# Altium PCB BLE_Motion_Tracker_PCB.PcbDoc
Units mil, origin at the board's own origin, x right, y up, seen from the top; angles counter-clockwise.
Board outline 2100 x 2000 mil, 4 copper layers (Top Layer, Ground Layer, Power Layer, Bottom Layer), stack 23.756 mil thick; 15 components, 15 nets, 79 pads, 15 vias.
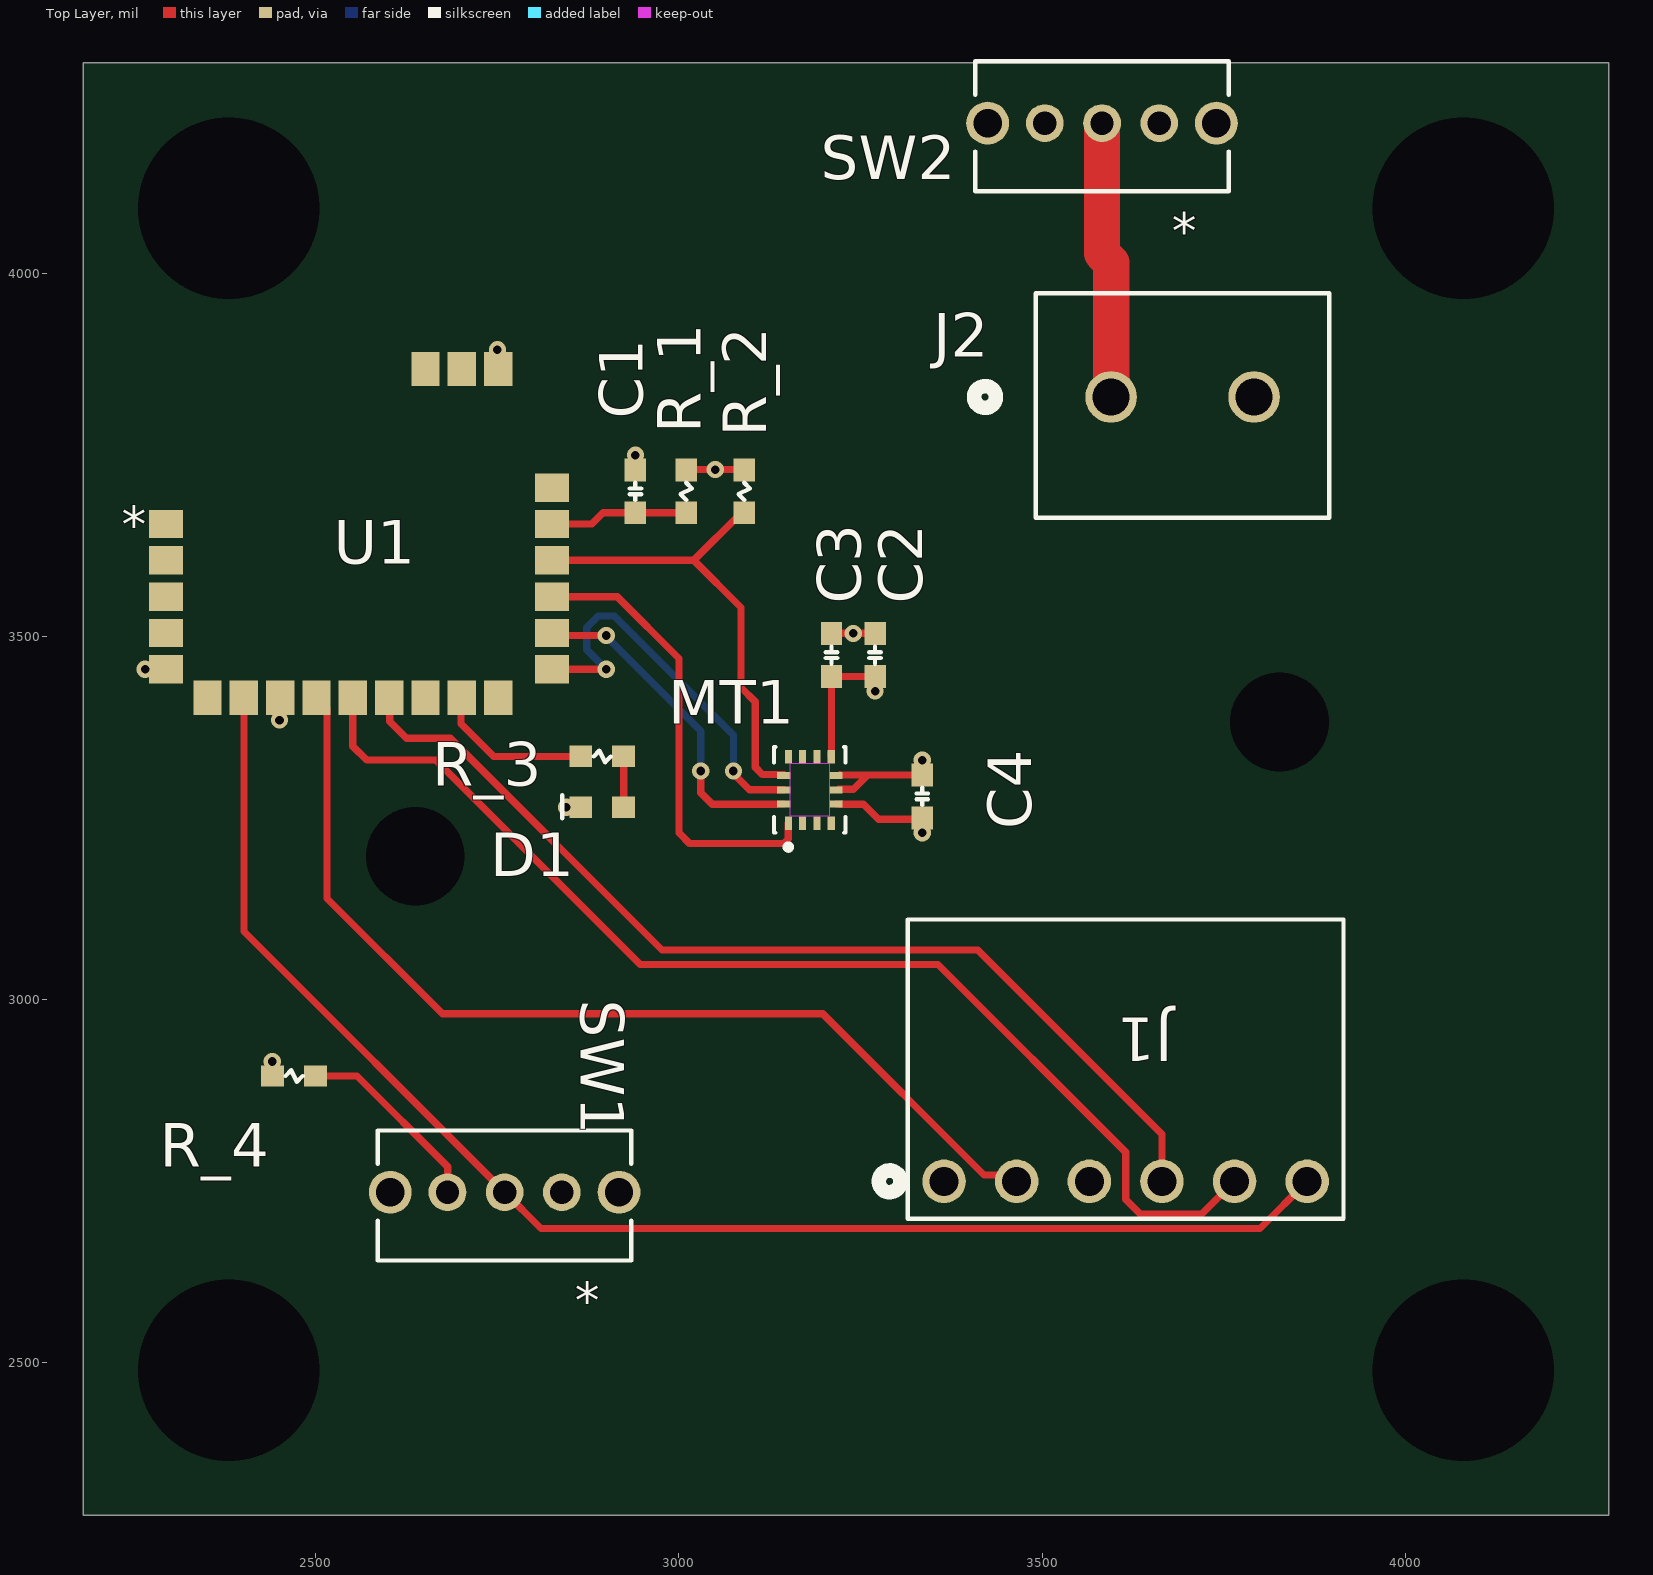
[diagram p0: Top Layer view]
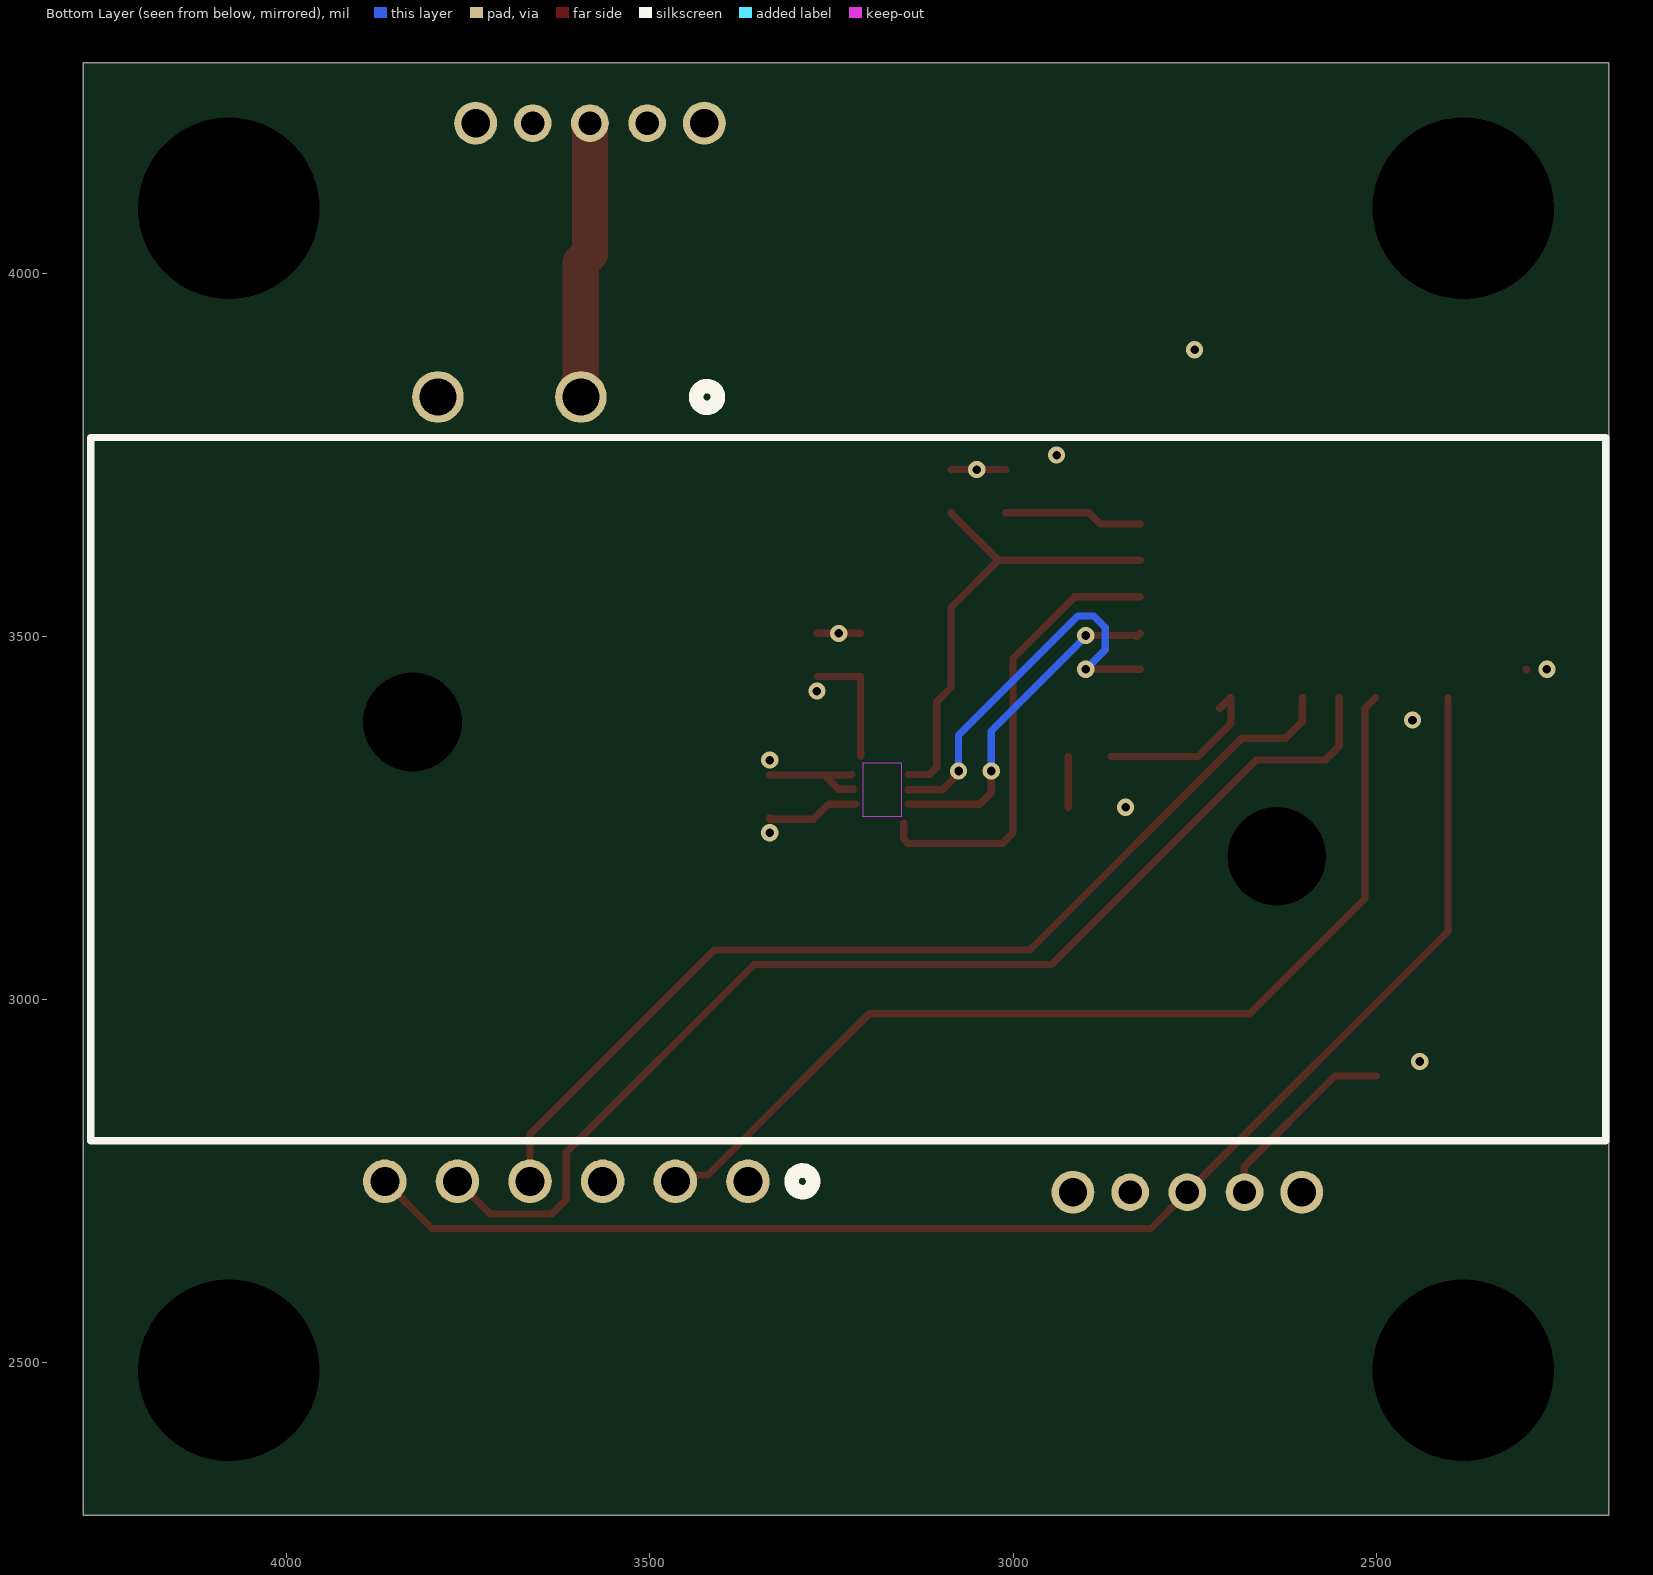
[diagram p1: Bottom Layer view, seen from below]
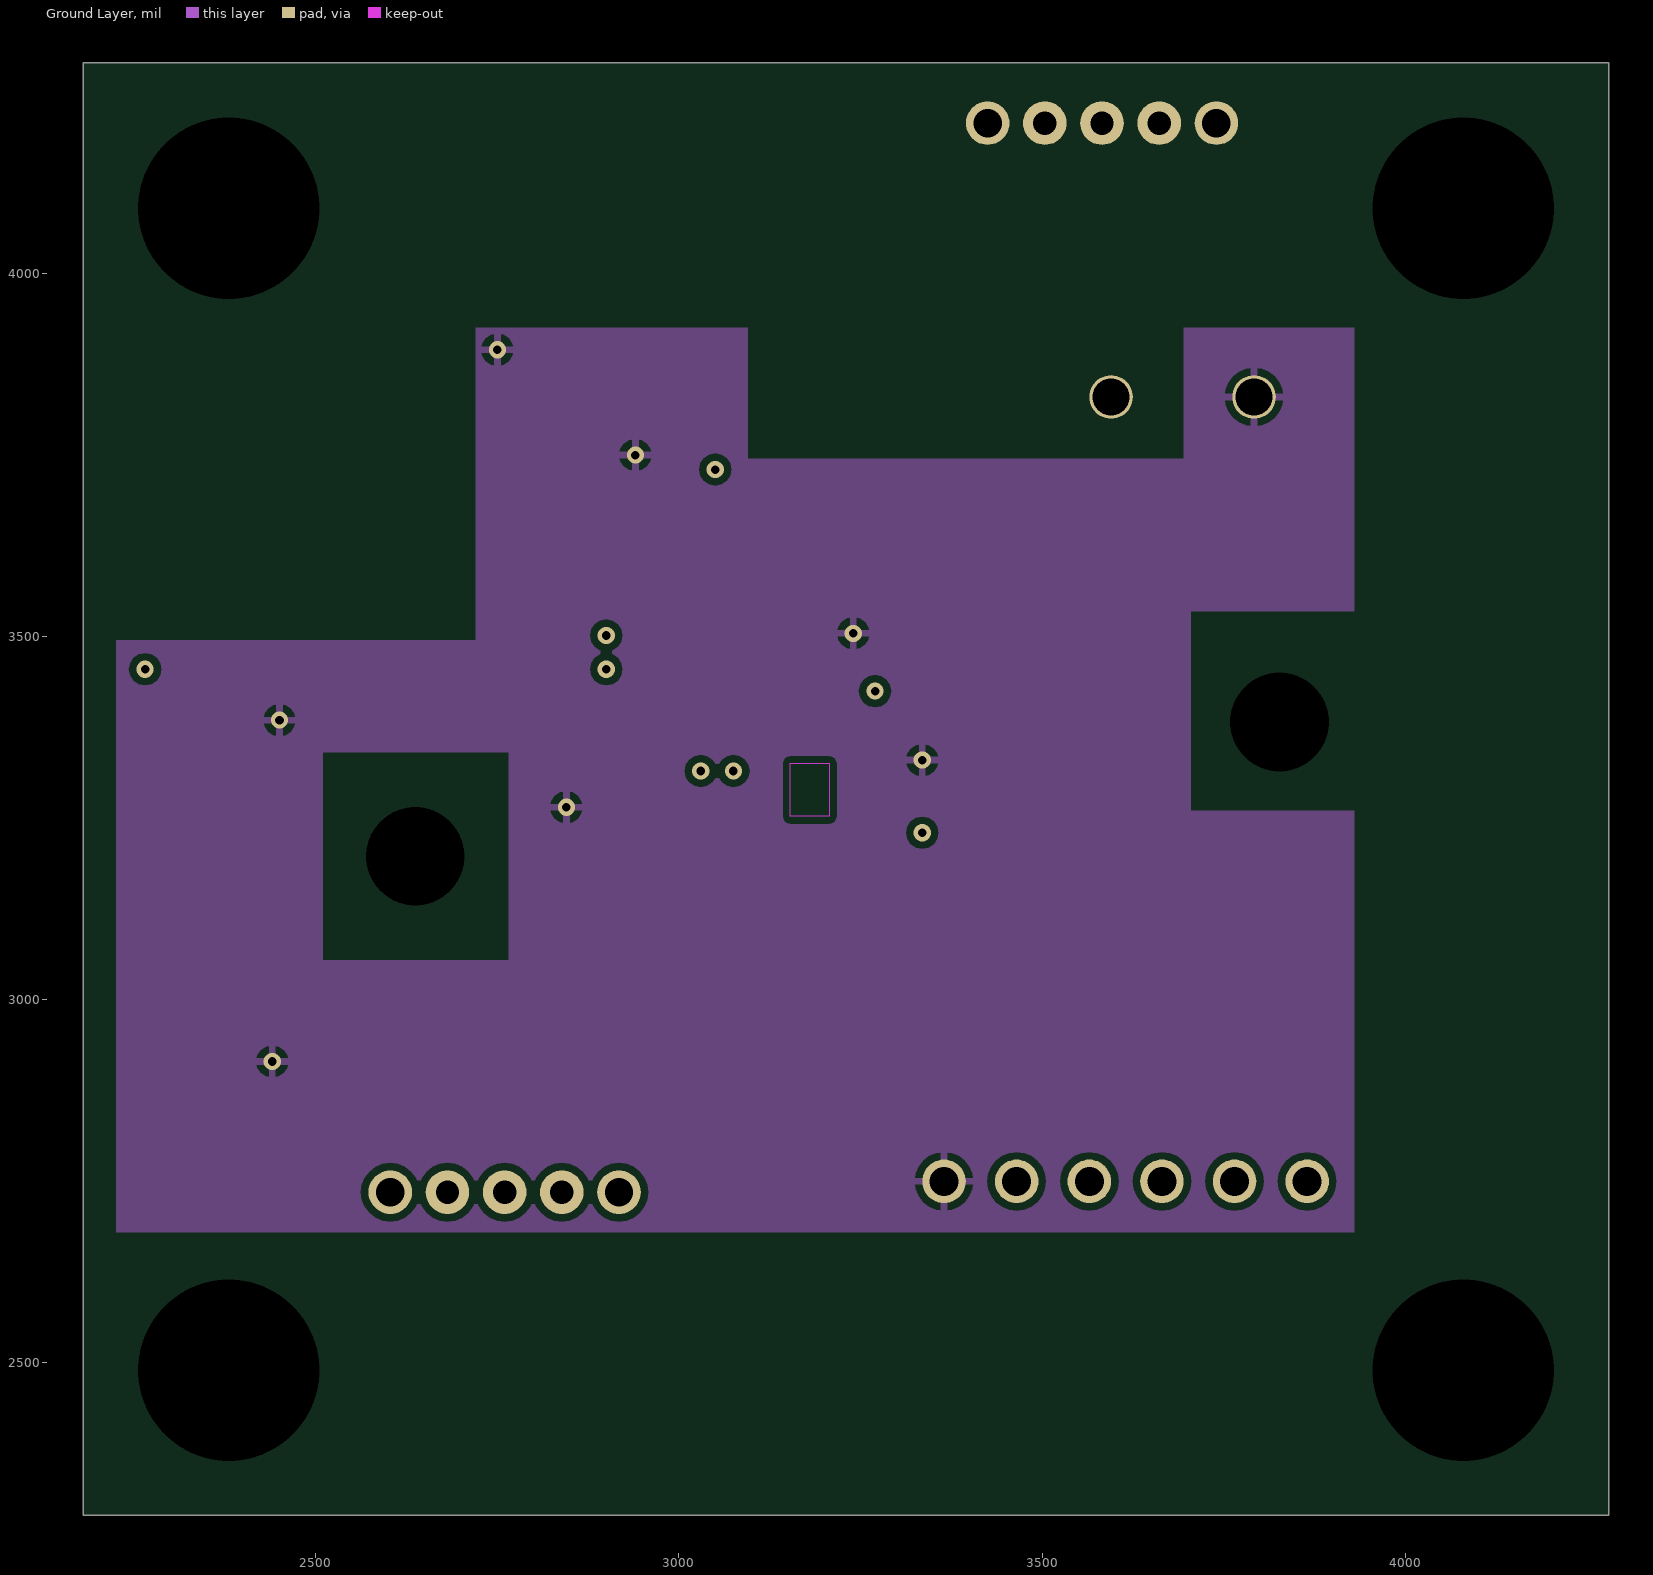
[diagram p2: Ground Layer]
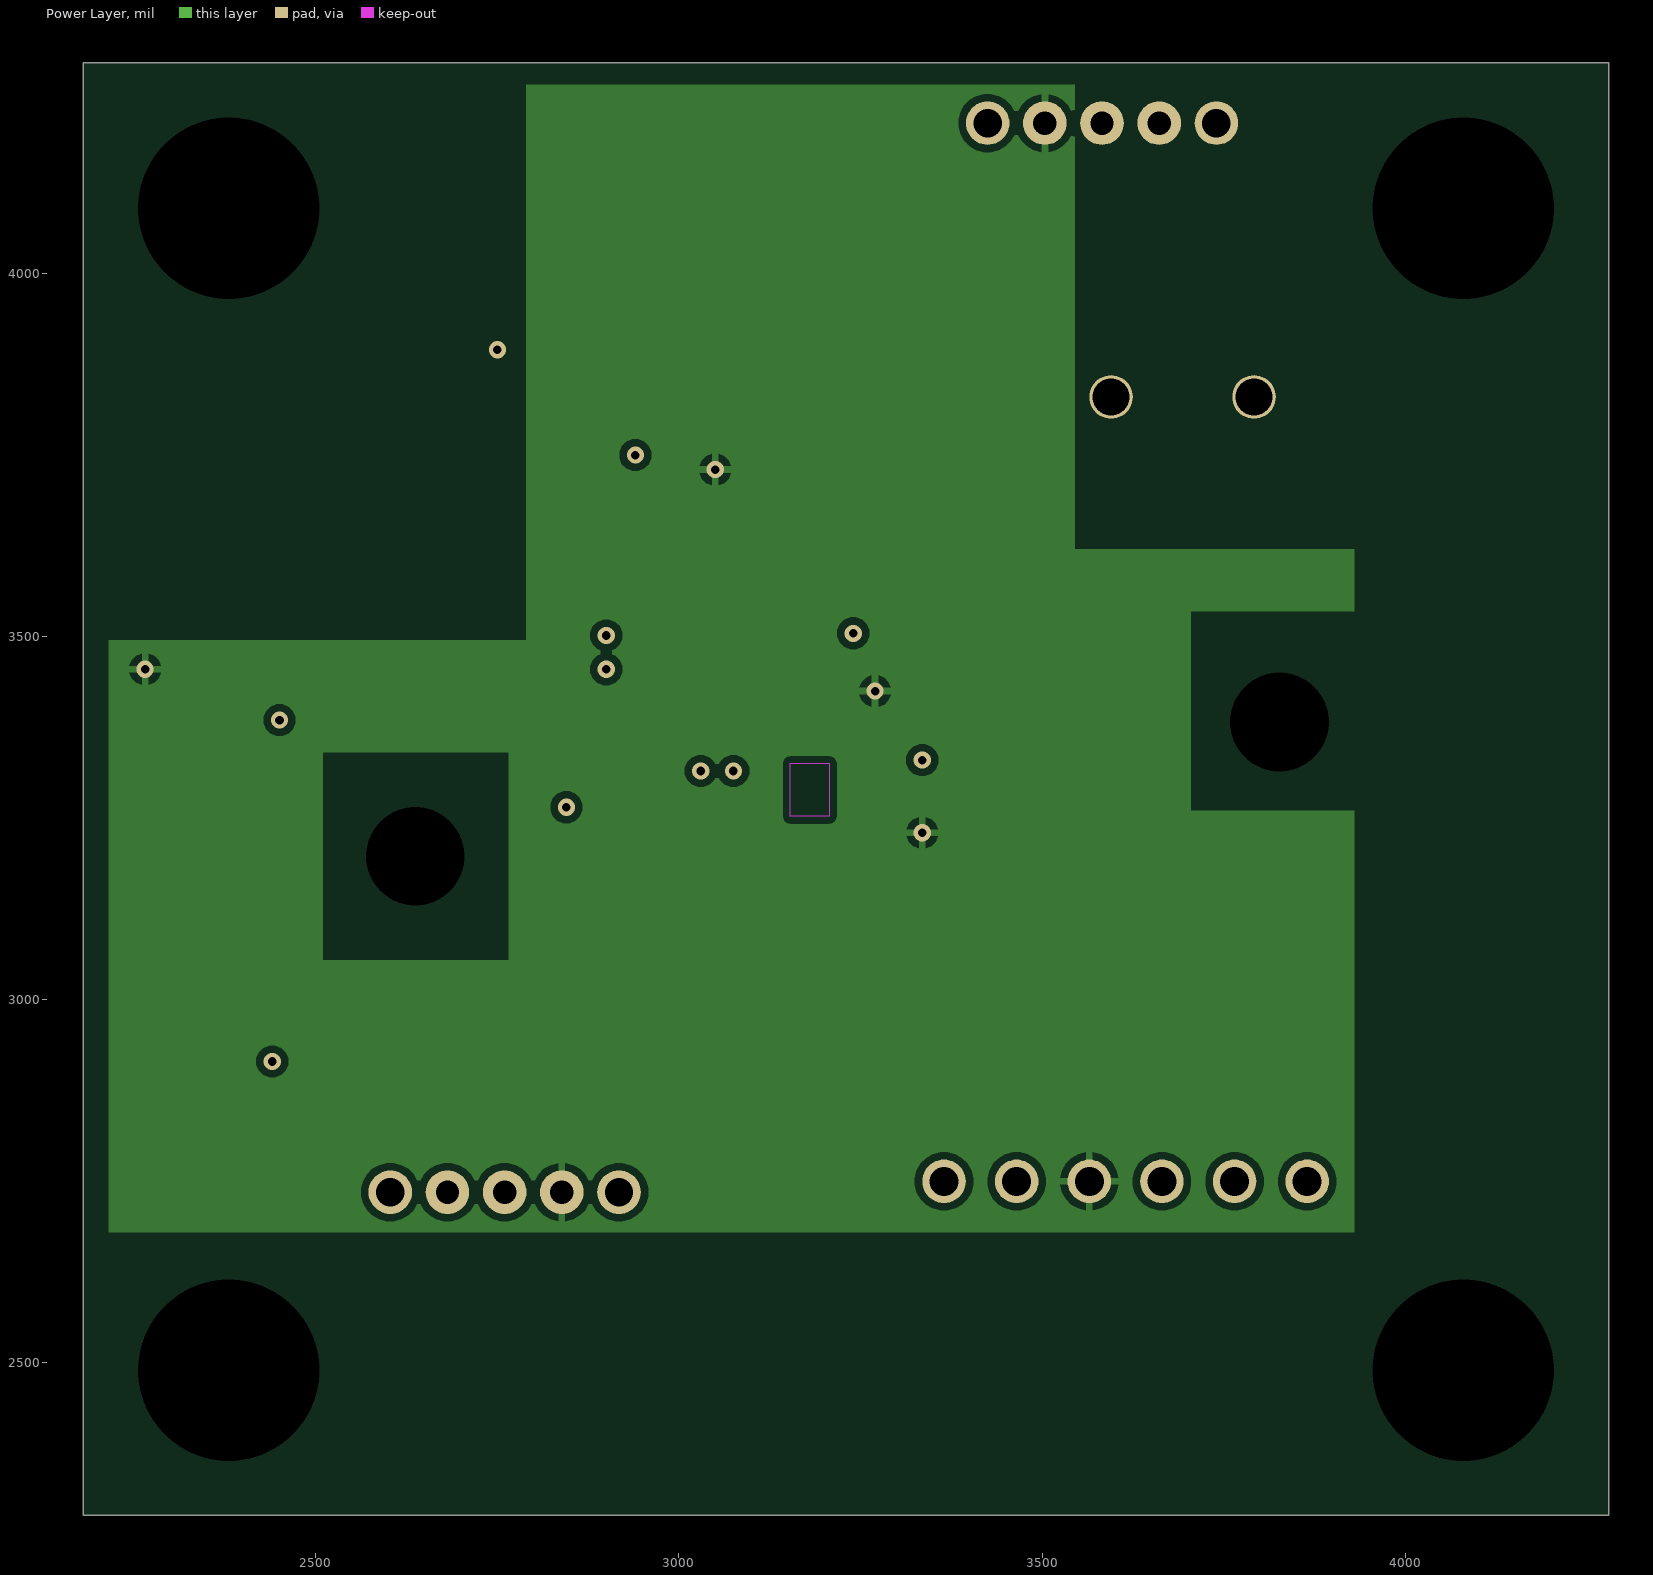
[diagram p3: Power Layer]
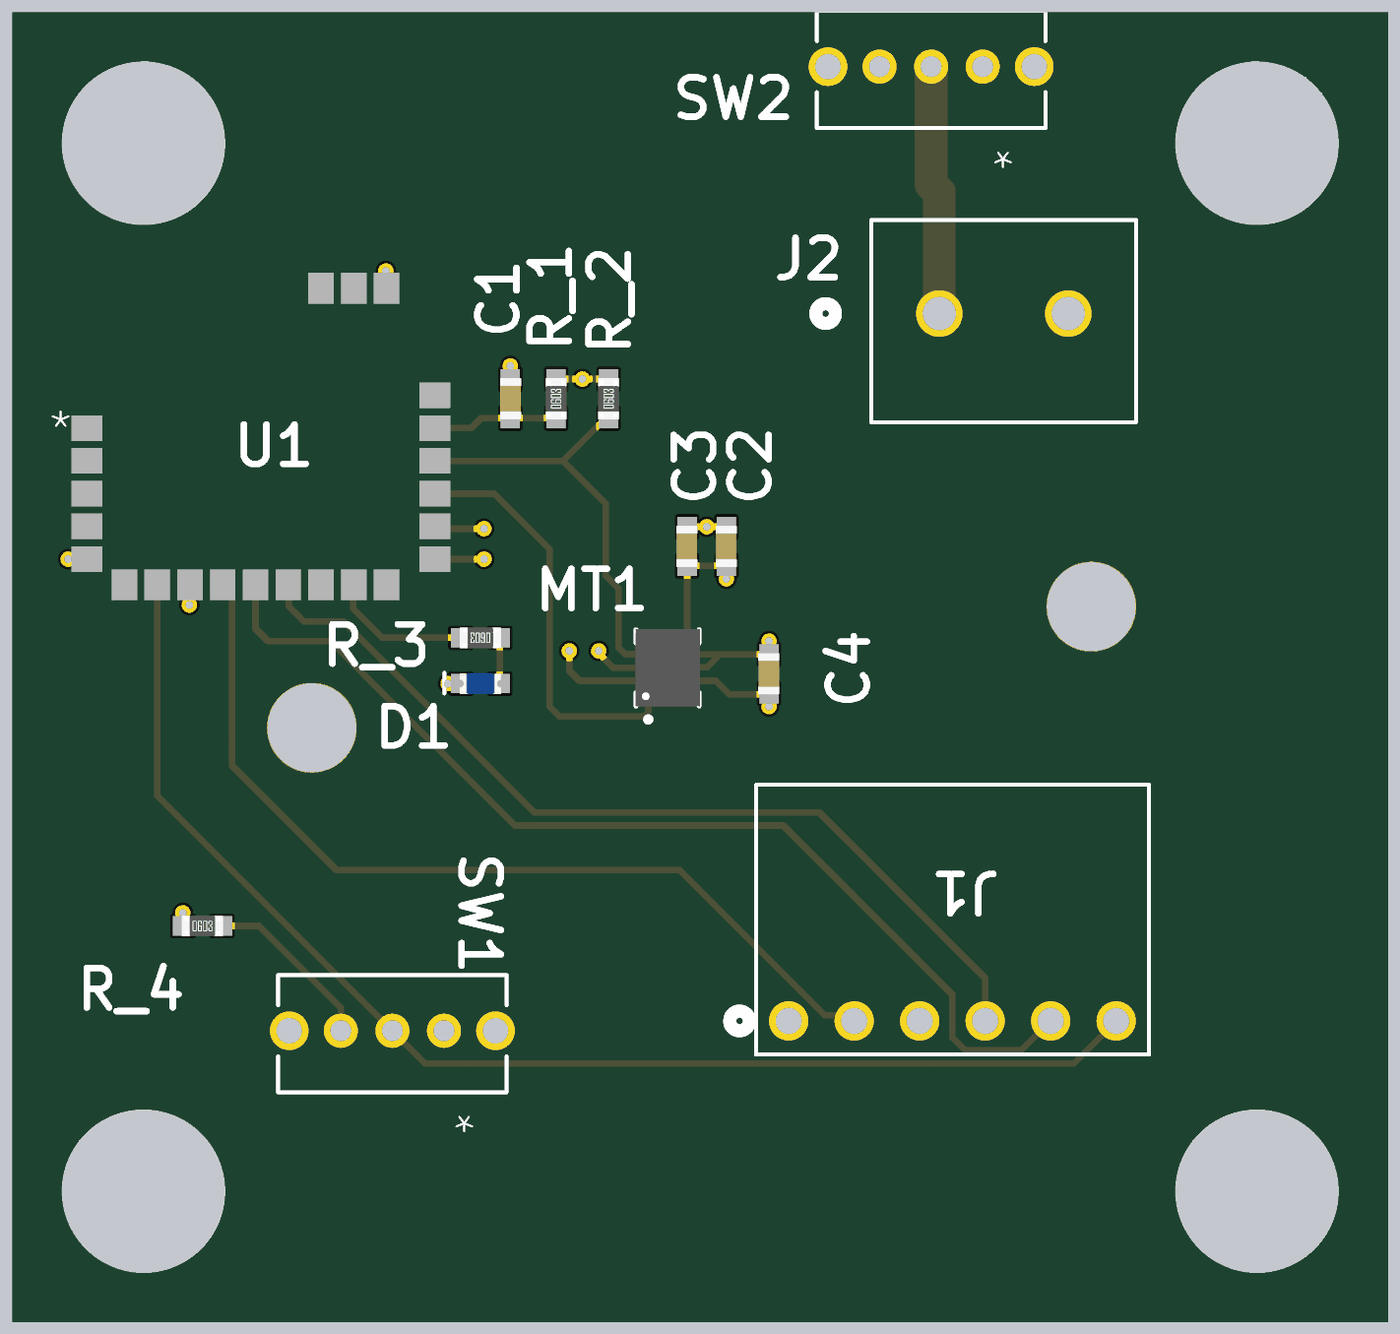
[diagram p4: 3D render of the assembled board from above, using the file's embedded part models]

## Layer stack, top to bottom
Top Solder: solder mask 0.4, Solder Resist, Dk 3.5
Top Layer: signal copper 1.4
Dielectric 2: prepreg 2.8, PP-006, Dk 4.1
Ground Layer: signal copper 1.378
Dielectric 1: dielectric 12.6, FR-4, Dk 4.8
Power Layer: signal copper 1.378
Dielectric 3: prepreg 2.8, PP-006, Dk 4.1
Bottom Layer: signal copper 1.4
Bottom Solder: solder mask 0.4, Solder Resist, Dk 3.5

## Board outline
2180,2290 4280,2290 4280,4290 2180,4290

## Design rules (kind name [scope] priority, off if disabled: settings)
Clearance [All] p1: gap=10 ignorepadtopadclearanceinfootprint=FALSE
PolygonConnect [All] p1: connectstyle=Relief reliefconductorwidth=10 reliefentries=4 polygonreliefangle="90 Angle" airgapwidth=10
RoutingVias [All] p1: holewidth=28 width=50 viastyle="Through Hole" minholewidth=28 minwidth=50 maxholewidth=28 maxwidth=50
SolderMaskExpansion [All] p1: expansion=4 istentingtop=FALSE
SupplyNets "Schematic Supply Nets_1" [InNet('GND')] p1: voltage=0.000
SupplyNets "Schematic Supply Nets" [InNet('3V')] p2: voltage=0.000
Width [All] p1: maxlimit=50 minlimit=10 preferedwidth=10 minimp=50.000000 maximp=50.000000 favimp=50.000000
30 further rules are at their usual default settings.

## Classes and differential pairs
component class Connectors: J1 J2 SW2
component class BLUENRG-M2SA: C1 D1 R_1 R_2 R_3 R_4 SW1 U1
component class Accel: C2 C3 C4 MT1

## Components (designator, comment, footprint, x,y, rotation, side; value= is the part's Value field where it differs from the comment)
C1 "10nF" CAP-0603 2940,3700 r270 top
C2 ".1uF" CAP-0603 3270,3474.53 r90 top
C3 "2.2uF" CAP-0603 3210,3474.53 r90 top
C4 "10nF" CAP-0603 3335,3280 r90 top
D1 "LEDBLUE-0603" LEDBLUE-0603 2894.34,3265 r180 top
J1 "22052061" CONN_22-05-2061_MOL 3365,2750 r180 top
J2 "691137710002" CONN2_710002_WRE 3595,3830 r0 top
MT1 "ICM-42670-P" XDCR_ICM-42670-P 3180.16,3289 r90 top
R_1 "47K" RES-0603 3010,3700 r90 top
R_2 "47K" RES-0603 3090,3700 r90 top
R_3 "100" RES-0603 2894.34,3335 r180 top
R_4 "47K" RES-0603 2470,2895 r0 top
SW1 "1825232-1" 1825232-1_TEC 2838.74,2735 r180 top
SW2 "1825232-1" 1825232-1_TEC 3661.26,4207 r180 top
U1 "BLUENRG-M2SA" BLUENRG-2M_STM 2559.25,3642.13 r0 top

## Footprints (in the part's own frame and the unit in brackets; to place one, negate y for a bottom-side part, rotate by r counter-clockwise, add the part's x,y. Pads: shape width x height; smd on the part's side, far side on the other; paste and mask are expansions set on the pad)
1825232-1_TEC [mil]
  round 52 / inner round 60 / far side round 52 hole 32 paste-99999 mask+0: 1(0,0) 2(78.74,0) 3(157.48,0)
  round 59 / inner round 60 / far side round 59 hole 39 paste-99999 mask+0: 4(-78.74,0) 5(236.22,0)
  silkscreen extent -96,-85 253,94
BLUENRG-2M_STM [mil]
  rect 47x39 smd paste+0 mask+0: 1(-265.75,12.87) 2(-265.75,-37.13) 3(-265.75,-87.13) 4(-265.75,-137.13) 5(-265.75,-187.13) 15(265.75,-187.13) 16(265.75,-137.13) 17(265.75,-87.13) 18(265.75,-37.13) 19(265.75,12.87) 20(265.75,62.87)
  rect 39x47 smd paste+0 mask+0: 6(-208.27,-226.38) 7(-158.27,-226.38) 8(-108.27,-226.38) 9(-58.27,-226.38) 10(-8.27,-226.38) 11(41.73,-226.38) 12(91.73,-226.38) 13(141.73,-226.38) 14(191.73,-226.38) 21(191.73,226.38) 22(141.73,226.38) 23(91.73,226.38)
CAP-0603 [mm]
  rect 0.8x0.75 smd: 1(-0.75,0) 2(0.75,0)
  silkscreen extent -0.3,-0.2 0.3,0.2, body extent -0.8,-0.4 0.8,0.42, height 0.81
CONN2_710002_WRE [mil]
  round 71 / inner round 60 / far side round 71 hole 51 paste-99999 mask+0: 1(0,0) 2(196.85,0)
  silkscreen extent -189,-166 300,143
CONN_22-05-2061_MOL [mil]
  round 60 hole 40 paste-99999 mask+0: 1(0,0) 2(-100,0) 3(-200,0) 4(-300,0) 5(-400,0) 6(-500,0)
  silkscreen extent -550,-361 90,51
LEDBLUE-0603 [mm]
  rect 0.8x0.75 smd: A(-0.75,0) K(0.75,0)
  silkscreen extent 1.4,-0.42 1.4,0.38, body extent -0.8,-0.4 0.8,0.4, height 0.53
RES-0603 [mm]
  rect 0.8x0.75 smd: 1(-0.75,0) 2(0.75,0)
  silkscreen extent -0.3,-0.2 0.3,0.2, body extent -0.8,-0.4 0.8,0.4, height 0.44
XDCR_ICM-42670-P [mm]
  rect 0.475x0.25 smd paste-1 mask+0.05: 1(-1.162,0.75) 2(-1.162,0.25) 3(-1.162,-0.25) 4(-1.162,-0.75) 8(1.162,-0.75) 9(1.162,-0.25) 10(1.162,0.25) 11(1.162,0.75)
  rect 0.25x0.475 smd paste-1 mask+0.05: 5(-0.5,-0.913) 6(0,-0.913) 7(0.5,-0.913) 12(0.5,0.913) 13(0,0.913) 14(-0.5,0.913)
  Keep-Out Layer region: 0.925,-0.675 -0.925,-0.675 -0.925,0.675 0.925,0.675
  silkscreen extent -2.1,-1.25 1.5,1.25, body extent -1.5,-1.25 1.5,1.25, height 0.81

## Part data
C1 C2 C3 C4: library part CMP-009-000303-1, Design Item ID=CAP-0603, Source=ife19_Elec_Library.SchLib
D1: library part CMP-009-000191-1, Design Item ID=LEDBLUE-0603, Source=ife19_Elec_Library.SchLib
J1: "FTDI UART Flashing connector -- https://www.mouser.com/ProductDetail/Molex/22-05-2061?qs=th8CuLdcYnn%252BP%252BN0RJkmpg%3D%3D", Mfr_Name="Molex Connector Corporation", RefDes=RefDes, Type=Type
J2: "Connector to provide Battery voltage -- https://www.mouser.com/ProductDetail/Wurth-Elektronik/691137910002?qs=sPbYRqrBIVkdp9j8kfiV1w%3D%3D", Mfr_Name="Wurth Electronics", RefDes=RefDes, Type=Type
MT1: "https://www.mouser.com/ProductDetail/TDK-InvenSense/ICM-42670-P?qs=iLbezkQI%2BsgK8sMF5V7fQQ%3D%3D", Package=None, Availability=Unavailable, MP=ICM-42670-P, Price=None
R_1 R_2 R_3 R_4: library part CMP-014-000032-1, Design Item ID=RES-0603, Source=ife19_Elec_Library.SchLib
SW1 SW2: "https://www.mouser.com/ProductDetail/655-1825232-1", Mfr_Name="TE Connectivity", RefDes=RefDes, Type=Type
U1: "https://www.mouser.com/ProductDetail/STMicroelectronics/BLUENRG-M2SA?qs=%252B6g0mu59x7K3hjyySj690A%3D%3D", Mfr_Name=STMicroelectronics, RefDes=RefDes, Type=Type

## Free pads (board coordinates)
  round 0 hole 250 unplated: 8(4080,4090) 9(2380,2490) 12(4080,2490) 13(2380,4090)
  round 0 hole 136: 10(3827,3382.5) 11(2637,3197.5)

## Via types
v1: diameter 23.62, hole 11.81, Top Layer to Bottom Layer, 15 vias

## Nets (pads, with @x,y where several pads share a name; then routed paths per layer and width w, separated by ;. In a path a pad name is that pad's centre, name@x,y a point inside that pad or via, vN(x,y) a via of type N, cw(c..) or ccw(c..) an arc to the next point about the centre after c; other vN are vias at no path point)
3V: C2.1 C3.1 C4.1 J1.3 MT1.5 MT1.8 R_1.2 R_2.2 SW1.1 SW2.3 U1.5 | length 376.9
  Top Layer w10: U1.5@2292.6,3454.09 U1.5 ; R_1.2 3010.47,3730 v1(3050,3730) 3084.53,3730 R_2.2@3085,3729.53 ; MT1.8@3209.69,3335 3209.69,3339.27 3210,3339.59 C3.1 C2.1 ; MT1.5@3216.08,3269.55 3220.43,3269.55 3220.67,3269.31 3254.14,3269.31 3260,3263.45 3274.78,3248.68 C4.1@3333.21,3248.68 ; C4.1@3335,3248.68 C4.1@3333.21,3248.68 ; C4.1 C4.1@3333.21,3248.68
  other v1: 3335,3230 3270,3425 2265,3455
GND: C1.1 C2.2 C3.2 C4.2 D1.K J1.1 J2.2 MT1.6 MT1.7 R_4.1 U1.8 U1.21 | length 225.6
  Top Layer w10: C3.2 3210.47,3504.53 v1(3240,3504.53) 3269.53,3504.53 C2.2 ; MT1.6@3220,3290 3240.47,3290 3260,3309.53 ; MT1.7@3221.73,3310 3222.2,3309.53 3260,3309.53 ; v1@3332.39,3327.39 v1(3335,3330) ; C4.2 3260,3309.53
  other v1: 2440,2915 2845,3265 2450,3385 2940,3750 2750,3895
NetC1_2: C1.2 R_1.1 U1.19 | length 191.4
  Top Layer w10: U1.19 2880,3655 2895.47,3670.47 C1.2 R_1.1
NetD1_A: D1.A R_3.1 | length 70
  Top Layer w10: D1.A R_3.1
NetJ1_2: J1.2 U1.9 | length 1393.1
  Top Layer w10: U1.9 2515.48,3401.25 2515.48,3139.52 2674.4,2980.6 3198.04,2980.6 3420,2758.64 3456.36,2758.64 J1.2
NetJ1_4: J1.4 U1.11 | length 1396.4
  Top Layer w10: U1.11 2601.89,3414.84 2601.89,3383.11 2625,3360 2685,3360 2976.59,3068.41 3411.59,3068.41 3665,2815 J1.4
NetJ1_5: J1.5 U1.10 | length 1604.2
  Top Layer w10: U1.10 2550.98,3349.02 2570,3330 2665,3330 2946.59,3048.41 3356.59,3048.41 3615,2790 3615,2725 3635,2705 3720,2705 J1.5
NetJ1_6: J1.6 SW1.2 U1.7 | length 1982.1
  Top Layer w10: U1.7 2400.98,3094.02 SW1.2 2810,2685 3800,2685 J1.6
NetJ2_1: J2.1 SW2.2 | length 382.2
  Top Layer w50: SW2.2 3582.52,4027.48 3595,4015 J2.1
NetMT1_1: MT1.1 U1.17 | length 631.7
  Top Layer w10: U1.17 2915,3555 3000,3470 3000,3230 3015,3215 3144.14,3215 3150.63,3221.49 MT1.1@3150.63,3243.46
NetMT1_12: MT1.12 R_2.1 U1.18 | length 651.1
  Top Layer w10: U1.18 3020.51,3605 ; R_2.1@3085,3670.47 3085,3669.49 3020.51,3605 ; MT1.12@3144.23,3310 3115,3310 3105,3320 3105,3410.51 3085.51,3430 3085.51,3540 3020.51,3605
NetMT1_13: MT1.13 U1.15 | length 551.7
  Top Layer w10: U1.15 v1(2900,3455) ; v1(3075,3315) 3075,3311.31 3097.08,3289.23 MT1.13@3144.23,3289.23
  Bottom Layer w10: v1(2900,3455) 2872.98,3482.02 2872.98,3512.69 2888.69,3528.39 2910.9,3528.39 3075,3364.29 v1(3075,3315)
NetMT1_14: MT1.14 U1.16 | length 469.6
  Top Layer w10: U1.16 2830,3500 2831.58,3501.58 v1(2899.79,3501.58) ; v1(3030,3315) 3030,3285 3045.77,3269.23 3135.36,3269.23 3135.05,3269.55 MT1.14@3144.23,3269.55
  Bottom Layer w10: v1(2899.79,3501.58) 2899.79,3500.21 3030,3370 v1(3030,3315)
NetR_3_2: R_3.2 U1.13 | length 240.1
  Top Layer w10: U1.13@2715.48,3401.25 U1.13 2700,3414.76 2700,3380 2745,3335 R_3.2
NetR_4_2: R_4.2 SW1.3 | length 268.9
  Top Layer w10: R_4.2 2556.63,2895 2681.49,2770.14 2681.49,2735.23 SW1.3
pads on no net: MT1.2 MT1.3 MT1.4 MT1.9 MT1.10 MT1.11 SW1.4 SW1.5 SW2.1 SW2.4 SW2.5 U1.1 U1.2 U1.3 U1.4 U1.6 U1.12 U1.14 U1.20 U1.22 U1.23

## Polygon pours and split planes (outlines as drawn)
3V on Power Layer "3V_L03_P002" (solid, pour order 2): 2215,3495 2790,3495 2790,4260 3930,4260 3930,2680 2215,2680
GND on Ground Layer "Ground Layer-No Net" (solid, pour order 7): 2225,2680 3930,2680 3930,3925 3695,3925 3695,3745 3095,3745 3095,3925 2720,3925 2720,3495 2225,3495

## Other copper
Ground Layer:
  pour cut-out: 3705,3260 3955,3260 3955,3535 3705,3535
  pour cut-out: 2510,3340 2765,3340 2765,3055 2510,3055
Power Layer:
  pour cut-out: 2510,3340 2765,3340 2765,3055 2510,3055
  pour cut-out: 3705,3535 3705,3260 3955,3260 3955,3535
  pour cut-out: 3545,4270 3955,4270 3955,3620 3545,3620

## Silkscreen, mask and mechanical layers (free items; w line width, h text height)
Bottom Overlay:
  lines w10: 2184,2806 4270,2806 4270,3774 2184,3774 2184,2806
Mechanical 1:
  lines w10: 2180,2290 4280,2290 4280,4290 2180,4290 2180,2790 2180,3290 2180,2290

## Text inside footprints (layer, text, board x,y; h text height)
SW1: Top Overlay "*" at 2890.61,2632 h50 r180; Mechanical 13 "*" at 2890.61,2637.5 h50 r180
SW2: Top Overlay "*" at 3713.13,4104 h50 r180; Mechanical 13 "*" at 3605,4050 h50 r180
U1: Top Overlay "*" at 2232.5,3630 h50; Mechanical 13 "*" at 2329.5,3630 h50